# Altium PCB Bottom.PcbDoc
Units mm, origin at the board's own origin, x right, y up, seen from the top; angles counter-clockwise.
Board outline 23.12 x 21.25 mm, 2 copper layers (Top Layer, Bottom Layer); 16 components, 26 nets, 43 pads, 32 vias.
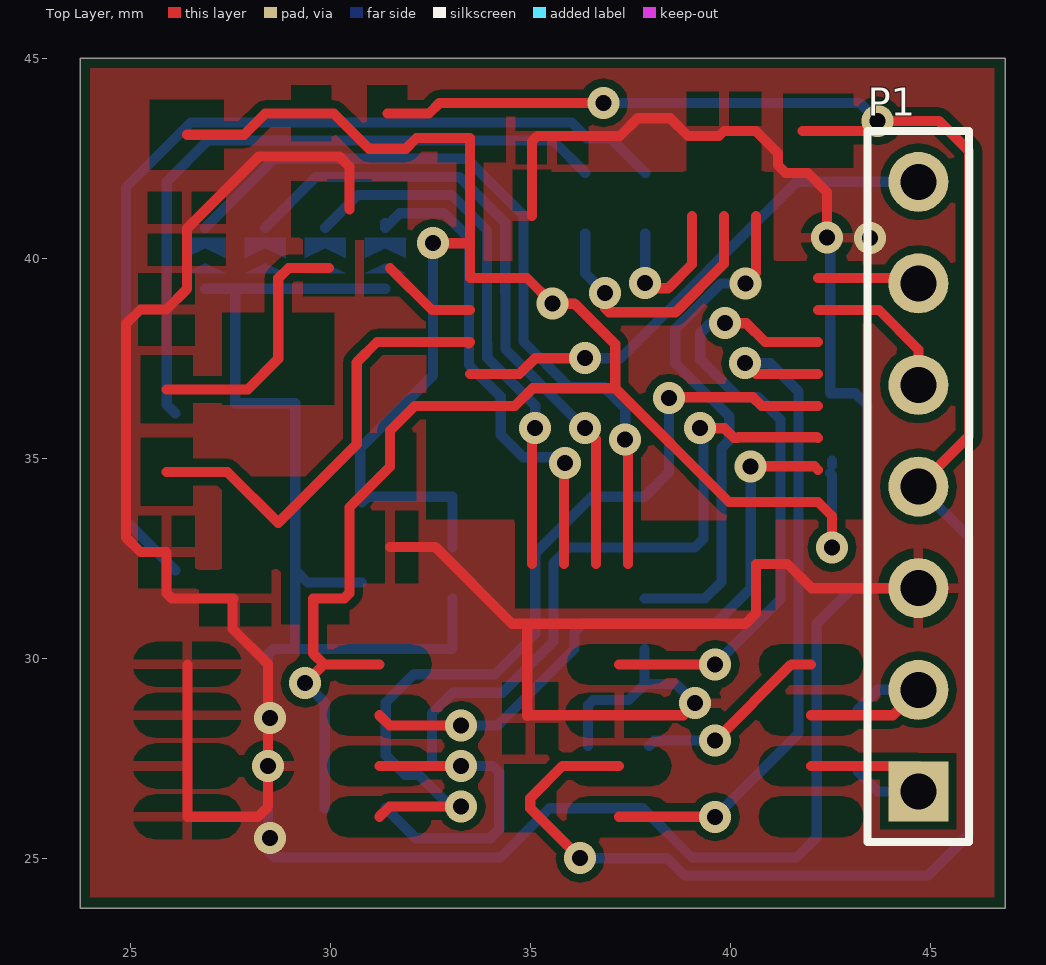
[diagram p0: Top Layer view]
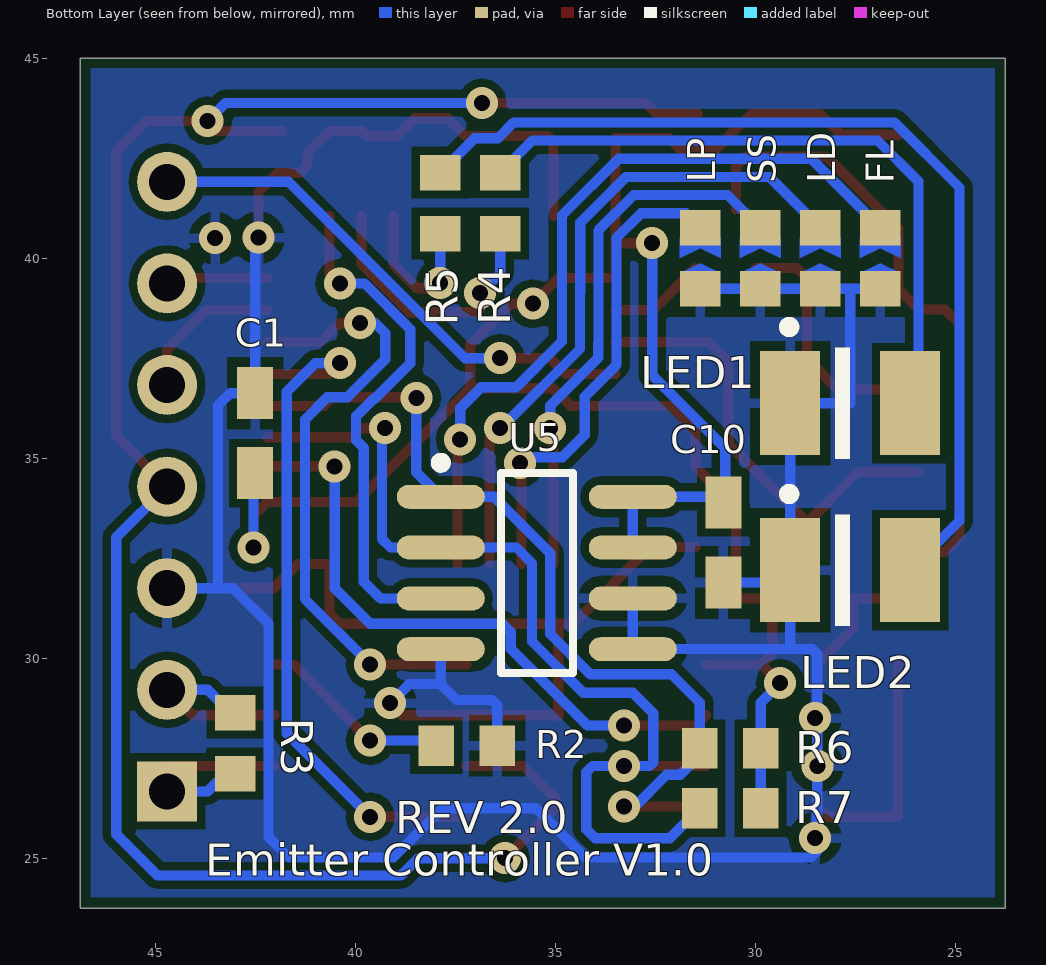
[diagram p1: Bottom Layer view, seen from below]

## Layer stack, top to bottom
Top Solder: solder mask 0.0102, Solder Resist, Dk 3.5
Top Layer: signal copper 0.0356
Dielectric 1: dielectric 0.32, FR-4, Dk 4.8
Bottom Layer: signal copper 0.0356
Bottom Solder: solder mask 0.0102, Solder Resist, Dk 3.5

## Board outline
23.75,23.75 46.875,23.75 46.875,45 23.75,45

## Design rules (kind name [scope] priority, off if disabled: settings)
Clearance [All] p1: gap=0.2
MinimumSolderMaskSliver [All] p1: minsoldermaskwidth=0.1
PolygonConnect [All] p1: connectstyle=Relief reliefconductorwidth=0.254 reliefentries=4 polygonreliefangle="90 Angle" airgapwidth=0.254
RoomDefinition LaserLEDController [InComponentClass('LaserLEDController')] p1: confinementstyle=ConfineIn formatcopy=TRUE lockcomponents=FALSE outline 23.75,23.75 46.875,23.75 46.875,45 23.75,45
RoutingVias [All] p1: holewidth=0.711 width=1.27 viastyle="Through Hole" minholewidth=0.4 minwidth=0.8 maxholewidth=0.711 maxwidth=1.27
SilkToSolderMaskClearance [IsPad] p1: minsilkscreentomaskgap=0 clearancetoexposedcopper=TRUE
SolderMaskExpansion [All] p1: expansion=0.102
Width [All] p1: maxlimit=0.254 minlimit=0.254 preferedwidth=0.254
28 further rules are at their usual default settings.

## Classes and differential pairs
component class LaserLEDController: C1 C10 FL LD LED1 LED2 LP R2 R3 R4 R5 R6 R7 SS U5

## Components (designator, comment, footprint, x,y, rotation, side; value= is the part's Value field where it differs from the comment)
C1 "ChipCap" CAP0603 42.5,35.625 r270 bottom
C10 "ChipCap" CAP0603 30.796,32.893 r90 bottom
FL "Jumper" J0603 26.875,40 r90 bottom
LD "Jumper" J0603 28.375,40 r90 bottom
LED1 "LED 0603" PLCC-2 27.625,36.375 r180 bottom
LED2 "LED 0603" PLCC-2 27.625,32.2 r180 bottom
LP "Jumper" J0603 31.375,40 r90 bottom
P1 "Header 7" HDR1X7 44.704,26.67 r90 top
R2 "ChipRes" RES0603 37.211,27.813 r0 bottom
R3 "ChipRes" RES0603 43,27.875 r270 bottom
R4 "ChipRes" RES0603 36.375,41.375 r270 bottom
R5 "ChipRes" RES0603 37.875,41.375 r270 bottom
R6 "ChipRes" RES0603 30.625,27.75 r0 bottom
R7 "ChipRes" RES0603 30.625,26.25 r0 bottom
SS "Jumper" J0603 29.875,40 r90 bottom
U5 "DS1631" SOIC8 35.46,32.131 r180 bottom

## Footprints (in the part's own frame and the unit in brackets; to place one, negate y for a bottom-side part, rotate by r counter-clockwise, add the part's x,y. Pads: shape width x height; smd on the part's side, far side on the other; paste and mask are expansions set on the pad)
CAP0603 [mm]
  rect 1.3x0.9 smd: 1(-1,0) 2(1,0)
  body extent -1.15,-0.4 1.15,0.4, height 0.55
HDR1X7 [mm] "Connector; Header; 7 Position"
  rect 1.5x1.5 hole 0.9: 1(0,0)
  round 1.5 hole 0.9: 2(2.54,0) 3(5.08,0) 4(7.62,0) 5(10.16,0) 6(12.7,0) 7(15.24,0)
  silkscreen extent -1.27,-1.27 16.51,1.27
J0603 [mil]
  rect 35x40 smd: 1(-30,0) 2(30,0)
  Top Layer region: 0,20 10,0 0,-20 20,-20 20,20
  Top Layer region: -15,-20 -15,20 -5,0
PLCC-2 [mm]
  rect 1.5x2.6 smd: 1(-1.5,0) 2(1.5,0)
  silkscreen extent -1.65,-1.4 0,2.03, body extent -1.75,-1.4 1.75,1.4, height 1.91
RES0603 [mil]
  rect 35x40 smd: 1(-30,0) 2(30,0)
SOIC8 [mm] "SOIC, 8-Leads, Body 4,90x3,90mm, Pitch 1,27mm, IPC Medium Density"
  oval 2.2x0.6 smd: 1(-2.4,1.905) 2(-2.4,0.635) 3(-2.4,-0.635) 4(-2.4,-1.905) 5(2.4,-1.905) 6(2.4,-0.635) 7(2.4,0.635) 8(2.4,1.905)
  silkscreen extent -2.53,-2.5 0.9,2.88, body extent -2.99,-2.45 3,2.45, height 1.61

## Part data
C1 C10: "Capacitor"
LED1 LED2: library part LED0603
P1: "Header, 7-Pin"
R2 R3 R4 R5 R6 R7: "Chip resistor"
U5: "High-Precision Digital  Thermometer and Thermostat"

## Via types
v1: diameter 0.8, hole 0.4, Top Layer to Bottom Layer, tented both sides, 32 vias

## Nets (pads, with @x,y where several pads share a name; then routed paths per layer and width w, separated by ;. In a path a pad name is that pad's centre, name@x,y a point inside that pad or via, vN(x,y) a via of type N, cw(c..) or ccw(c..) an arc to the next point about the centre after c; other vN are vias at no path point)
5V: P1.4 | length 50.2
  Top Layer w0.254: 31.43,43.618 32.47,43.618 32.736,43.884 v1(36.83,43.884) ; v1(36.25,25) 35,26.25 35,26.5 35.805,27.305 37.224,27.305 ; 41.815,43.18 43.434,43.18 v1(43.688,43.434) 45.212,43.434 45.974,42.672 45.974,35.56 P1.4
  Bottom Layer w0.254: v1(36.25,25) 38.423,25 38.858,24.565 44.94,24.565 45.974,25.599 45.974,33.02 P1.4 ; v1(36.83,43.884) 43.238,43.884 v1(43.688,43.434)
CAN_RX:  | length 17.5
  Top Layer w0.254: 37.224,26.035 v1(39.624,26.035) ; v1(40.375,37.375) 40.648,37.103 42.196,37.103
  Bottom Layer w0.254: v1(39.624,26.035) 41.71,28.121 41.71,36.665 41,37.375 v1(40.375,37.375)
CAN_TX:  | length 15.7
  Top Layer w0.254: 37.224,29.845 v1(39.624,29.845) ; v1(39.875,38.375) 40.403,38.375 40.876,37.903 42.196,37.903
  Bottom Layer w0.254: v1(39.624,29.845) 41.256,31.477 41.256,35.965 40.698,36.523 40.199,36.523 39.25,37.472 39.25,38.125 39.5,38.375 v1(39.875,38.375)
CANH: P1.2 R3.1 | length 4.7
  Top Layer w0.254: 42.024,28.575 44.069,28.575 P1.2
  Bottom Layer w0.254: R3.1@43.18,28.702 43.688,29.21 P1.2
CANL: P1.1 R3.2 | length 5
  Top Layer w0.254: 42.024,27.305 44.704,27.305 P1.1
  Bottom Layer w0.254: R3.2@43.18,27.178 43.688,26.67 P1.1
GND: C1.1 C10.1 FL.1 LD.1 LED1.1 LED2.1 LP.1 P1.3 R2.1 SS.1 U5.4 U5.5 U5.6 | length 129.5
  Top Layer w0.254: 26.429,29.845 26.429,28.575 26.429,27.305 26.429,26.035 28.194,26.035 28.448,26.289 v1(28.448,27.305) 28.448,29.845 27.559,30.734 27.559,31.48 27.575,31.496 26.035,31.496 25.908,31.623 25.908,32.655 25.257,32.655 24.892,33.02 24.892,38.354 25.257,38.719 25.908,38.719 26.416,39.227 26.416,40.735 28.226,42.545 30.226,42.545 30.48,42.291 30.48,41.218 ; 31.496,32.782 32.623,32.782 34.544,30.861 40.386,30.861 40.646,31.121 40.646,32.353 41.434,32.353 42.037,31.75 P1.3 ; 34.925,30.861 34.925,28.559 34.941,28.575 37.224,28.575 38.825,28.575 v1(39.125,28.875) ; 35.046,41.053 35.046,42.92 35.179,43.053 35.544,43.053 37.246,43.053 37.693,43.5 38.5,43.5 38.947,43.053 39.719,43.053 39.846,43.18 40.64,43.18 41.194,42.626 41.194,42.32 41.386,42.128 41.946,42.128 42.418,41.656 v1(42.418,40.513)
  Bottom Layer w0.254: FL.1 27.625,39.238 ; C10.1 29.432,31.893 LED2.1 ; LP.1 SS.1 LD.1 27.625,39.238 ; U5.6 U5.5 29.125,30.226 ; R2.1 36.449,28.829 36.576,28.956 37.465,28.956 37.86,29.351 ; U5.4 37.86,29.351 ; v1(39.125,28.875) 38.649,29.351 37.86,29.351 ; v1(42.418,40.513) 42.5,40.431 C1.1 43.125,36.625 43.434,36.316 43.434,31.75 ; P1.3 43.434,31.75 ; 27.625,39.238 27.625,36.375 LED1.1 LED2.1 ; 29.125,30.226 LED2.1 ; 29.125,30.226 28.575,30.226 28.448,30.099 v1(28.448,27.305) 28.448,25.177 28.606,25.019 34.25,25.019 35.481,26.25 37.815,26.25 39.046,25.019 41.656,25.019 42.164,25.527 42.164,30.861 43.053,31.75 43.434,31.75
  other v1: 28.5,25.5 28.5,28.5 43.5,40.5
I2C1_SCL: R7.2 U5.2 | length 25.3
  Top Layer w0.254: 31.229,27.305 v1(33.274,27.305) ; v1(39.25,35.75) 39.854,35.75 40.102,35.503 40.19,35.503 40.212,35.525 42.174,35.525 42.196,35.503
  Bottom Layer w0.254: R7.2 32.137,25.5 34,25.5 34.225,25.725 34.225,27.15 34.07,27.305 v1(33.274,27.305) 32.639,27.305 32.547,27.397 32.547,28.622 33.062,29.137 34.3,29.137 35.579,30.416 35.579,32.377 35.968,32.766 U5.2 39.116,32.766 39.332,32.982 39.332,35.669 v1(39.25,35.75)
I2C1_SDA: R6.2 U5.1 | length 22.2
  Top Layer w0.254: 31.229,26.035 31.483,26.289 v1(33.274,26.289) ; v1(38.466,36.506) 38.484,36.523 40.566,36.523 40.786,36.303 42.196,36.303
  Bottom Layer w0.254: v1(33.274,26.289) 33.013,26.289 32.217,27.085 31.875,27.085 31.387,27.573 R6.2 31.387,28.893 32.093,29.599 34.12,29.599 35.125,30.604 35.125,32.625 36.536,34.036 U5.1 38.472,34.648 38.472,36.5 v1(38.466,36.506)
J_FL: FL.2 | length 19.5
  Top Layer w0.254: 37.446,32.353 v1@37.446,35.401
  Bottom Layer w0.254: FL.2 28.6,42.487 33.415,42.487 34.829,41.073 34.829,39.629 34.833,39.625 34.833,37.917 35.977,36.773 36.852,36.773 37.375,36.25 v1(37.375,35.472)
J_LD: LD.2 | length 16.5
  Top Layer w0.254: v1(36.375,35.75) 36.646,35.479 36.646,32.353
  Bottom Layer w0.254: LD.2 29.646,42.033 33.227,42.033 34.375,40.885 34.375,39.129 34.379,39.125 34.379,37.729 36.358,35.75 v1(36.375,35.75)
J_LP: LP.2 | length 12.3
  Top Layer w0.254: 35.846,32.353 v1@35.846,34.852
  Bottom Layer w0.254: LP.2@31.375,40.875 LP.2 31.738,41.125 32.851,41.125 33.467,40.509 33.467,37.686 33.471,37.682 33.471,37.327 34.263,36.535 34.263,35.584 34.824,35.023 35.733,35.023 v1(35.875,34.881)
J_SS: SS.2 | length 13.6
  Top Layer w0.254: 35.046,32.353 35.046,35.671 v1(35.125,35.75)
  Bottom Layer w0.254: SS.2 30.692,41.579 33.039,41.579 33.921,40.697 33.921,37.874 33.925,37.87 33.925,37.515 35.125,36.315 v1(35.125,35.75)
NetC6_2:  | length 6.5
  Top Layer w0.254: 25.908,36.719 27.938,36.719 28.702,37.483 28.702,39.497 28.956,39.751 29.972,39.751
NetC7_2:  | length 11.2
  Top Layer w0.254: 25.908,34.655 27.43,34.655 28.702,33.383 30.665,35.346 30.665,37.396 31.172,37.903 33.496,37.903 33.464,37.871
NetLED1_2: LED1.2 R4.1 | length 17.1
  Bottom Layer w0.254: LED1.2@26.125,36.125 25.915,36.335 25.915,41.915 26.941,42.941 35.571,42.941 R4.1
NetLED2_2: LED2.2 R5.1 | length 24.3
  Bottom Layer w0.254: LED2.2 24.892,33.433 24.892,41.767 26.52,43.395 36.033,43.395 36.428,43 37.012,43 R5.1
NetR1_1:  | length 2.4
  Top Layer w0.254: 31.496,39.751 32.544,38.703 33.496,38.703
NetR2_2: R2.2 | length 4.9
  Top Layer w0.254: v1(39.624,27.94) 41.529,29.845 42.024,29.845
  Bottom Layer w0.254: R2.2 38.1,27.94 v1(39.624,27.94)
NetR4_2: R4.2 | length 6.8
  Top Layer w0.254: v1(36.875,39.125) 36.875,38.75 36.977,38.648 38.636,38.648 39.846,39.858 39.846,41.053
  Bottom Layer w0.254: R4.2 36.375,39.625 v1(36.875,39.125)
NetR5_2: R5.2 | length 4
  Top Layer w0.254: v1(37.875,39.375) 37.875,39.25 38.447,39.25 39.046,39.849 39.046,41.053
  Bottom Layer w0.254: v1@37.875,39.376 R5.2
NetU1_18:  | length 15.8
  Top Layer w0.254: 31.229,28.575 31.483,28.321 v1(33.274,28.321) ; v1(40.513,34.798) 42.101,34.798 42.196,34.703
  Bottom Layer w0.254: v1(33.274,28.321) 34.196,28.321 36.109,30.234 36.109,30.648 36.322,30.861 39.624,30.861 40.513,31.75 v1(40.513,34.798)
NRESET: P1.7 | length 13.2
  Top Layer w0.254: 33.496,37.103 34.728,37.103 35.125,37.5 v1(36.375,37.5)
  Bottom Layer w0.254: v1(36.375,37.5) 37.257,37.5 41.667,41.91 P1.7
SWDCLK: P1.6 | length 2.6
  Top Layer w0.254: 42.196,39.503 44.571,39.503 P1.6
SWDIO: P1.5 | length 3.8
  Top Layer w0.254: 42.196,38.703 43.72,38.703 44.704,37.719 P1.5
TOUT: U5.3 | length 13.1
  Top Layer w0.254: v1(40.386,39.37) 40.646,39.63 40.646,41.053
  Bottom Layer w0.254: U5.3 39.37,31.496 39.786,31.912 39.786,35.258 39.977,35.449 39.977,36.051 39.551,36.477 39.523,36.477 38.625,37.375 38.625,38.226 39.769,39.37 v1(40.386,39.37)
VCC: C1.2 C10.2 R6.1 R7.1 U5.7 U5.8 | length 56.6
  Top Layer w0.254: 26.416,43.085 27.845,43.085 28.378,43.618 29.53,43.618 30.091,43.618 30.972,42.737 31.888,42.737 32.156,43.005 33.496,43.005 33.496,40.375 ; v1(29.375,29.375) 29.845,29.845 ; 31.229,29.845 29.845,29.845 ; v1(32.574,40.374) 33.495,40.374 33.496,40.375 ; v1(42.545,32.766) 42.545,33.554 42.196,33.903 39.972,33.903 37.125,36.75 ; 29.845,29.845 29.575,30.115 29.575,31.496 30.353,31.496 30.48,31.623 30.48,33.766 31.496,34.782 31.496,35.687 32.112,36.303 33.496,36.303 34.613,36.303 35.06,36.75 37.125,36.75 ; 33.496,40.375 33.496,39.503 34.919,39.503 v1(35.56,38.862) 36.11,38.862 37.125,37.847 37.125,36.75
  Bottom Layer w0.254: v1(29.375,29.375) 29.863,28.887 R6.1 R7.1 ; v1(32.574,40.374) 32.574,37.074 30.75,35.25 30.75,33.939 C10.2 30.939,34.036 U5.8 U5.7 ; C1.2 42.545,34.58 v1(42.545,32.766) ; C1.2@42.545,34.814 C1.2@42.545,34.941

## Polygon pours and split planes (outlines as drawn)
GND on Bottom Layer "Keep-Out Layer-No Net 1" (solid, pour order 2): 23.75,23.75 46.875,23.75 46.875,45 23.75,45
GND on Top Layer "Keep-Out Layer-No Net" (solid, pour order 3): 23.75,23.75 46.875,23.75 46.875,45 23.75,45

## Silkscreen, mask and mechanical layers (free items; w line width, h text height)
Bottom Overlay:
  text "REV 2.0" at 39,25.625 h0.8
  text "Emitter Controller V1.0" at 43.75,24.565 h0.8
Mechanical 13:
  the board outline again, w0.1